# EAGLE board BCI_Module (EAGLE 6.4)
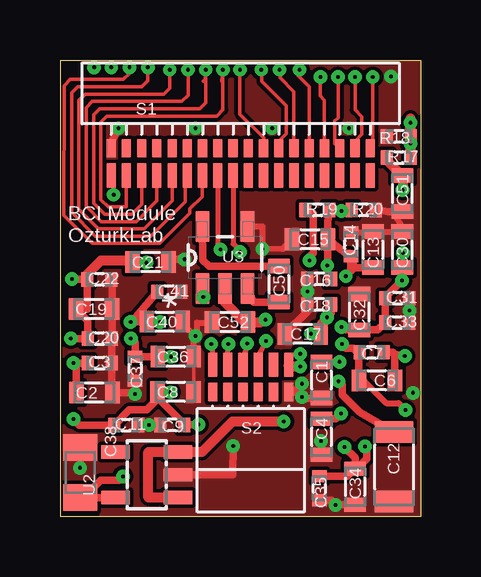
[diagram p0: board, top side]
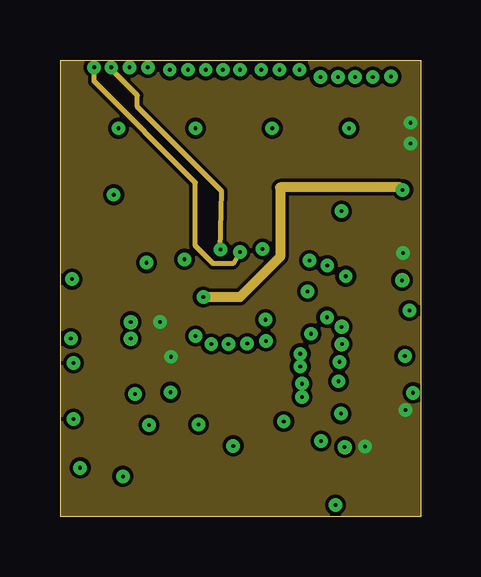
[diagram p1: board, inner layer Route2]
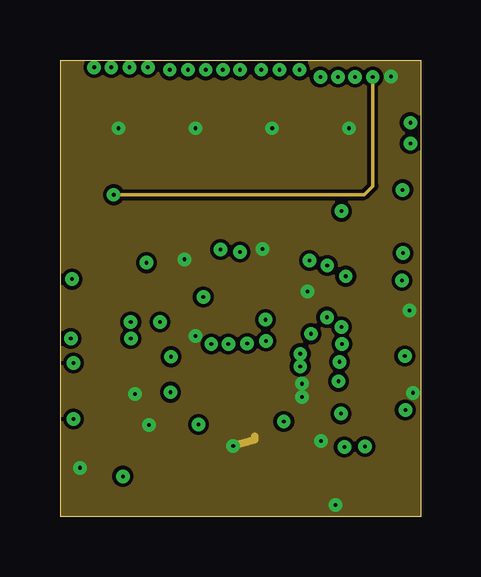
[diagram p2: board, inner layer Route3]
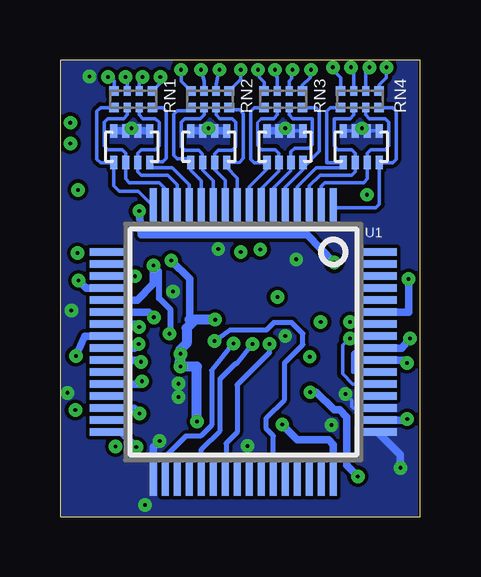
[diagram p3: board, bottom side, seen from below]

Size 15 x 19.02 mm. Coordinates in mm from the lower left corner, seen from the top.
Outline: 0,0 0,19.02 15,19.02 15,0 0,0
Copper layers (1*2*3*16): Top 0.035mm / dielectric 1.5mm / Route2 0.035mm / dielectric 0.15mm / Route3 0.035mm / dielectric 0.2mm / Bottom 0.035mm
Design rules "default *": minimum track width 5mil, minimum drill 5mil, track to track 6mil, track to pad 6mil, pad to pad 6mil, via to via 6mil, smd to smd 0mil, copper to edge 1mil, drill to drill 8mil, minimum pad ring 10mil, minimum via ring 8mil, stop-mask expansion 0mil, vias tented up to drill 7mil, thermal gap 10mil

## Footprints (pad centres in the part's own frame; a part is rotated, then mirrored left to right if it is on the bottom)
0603_R = smd 0.6 x 0.9: 1 -0.75,0; 2 0.75,0
0402_R = smd 0.5 x 0.6: 1 -0.5,0; 2 0.5,0
1206_R = smd 0.9 x 1.6: 1 -1.45,0; 2 1.45,0
R/2012-12R = smd 1.1 x 1.4: + 1.048,0; - -1.048,0
0402_R@1 = smd 0.5 x 0.6: 1 -0.5,0; 2 0.5,0
YC124 = smd 0.4 x 0.4: 1 -0.8,-0.35; 4 0.8,-0.35; 5 0.8,0.35; 8 -0.8,0.35 | smd 0.3 x 0.4: 2 -0.25,-0.35; 3 0.25,-0.35; 6 0.25,0.35; 7 -0.25,0.35
OMNETICS_A79025 = smd 0.381 x 0.762: B1 -5.397,-1.016; B2 -4.763,-1.016; B3 -4.128,-1.016; B4 -3.493,-1.016; B5 -2.857,-1.016; B6 -2.223,-1.016; B7 -1.587,-1.016; B8 -0.953,-1.016; B9 -0.318,-1.016; B10 0.318,-1.016; B11 0.953,-1.016; B12 1.587,-1.016; B13 2.223,-1.016; B14 2.857,-1.016; B15 3.493,-1.016; B16 4.128,-1.016; B17 4.763,-1.016; B18 5.397,-1.016 | smd 0.381 x 1.016: T1 -5.397,-2.159; T2 -4.763,-2.159; T3 -4.128,-2.159; T4 -3.493,-2.159; T5 -2.857,-2.159; T6 -2.223,-2.159; T7 -1.587,-2.159; T8 -0.953,-2.159; T9 -0.318,-2.159; T10 0.318,-2.159; T11 0.953,-2.159; T12 1.587,-2.159; T13 2.223,-2.159; T14 2.857,-2.159; T15 3.493,-2.159; T16 4.128,-2.159; T17 4.763,-2.159; T18 5.397,-2.159
OMNETICS_PZN-12-AA = smd 0.381 x 0.762: B1 1.587,-1.016; B2 0.953,-1.016; B3 0.318,-1.016; B4 -0.318,-1.016; B5 -0.953,-1.016; B6 -1.587,-1.016 | smd 0.381 x 1.016: T1 1.587,-2.159; T2 0.953,-2.159; T3 0.318,-2.159; T4 -0.318,-2.159; T5 -0.953,-2.159; T6 -1.587,-2.159
SQFP-S-10X10-64 = smd 0.3 x 1.6: 1 -3.75,-5.6; 2 -3.25,-5.6; 3 -2.75,-5.6; 4 -2.25,-5.6; 5 -1.75,-5.6; 6 -1.25,-5.6; 7 -0.75,-5.6; 8 -0.25,-5.6; 9 0.25,-5.6; 10 0.75,-5.6; 11 1.25,-5.6; 12 1.75,-5.6; 13 2.25,-5.6; 14 2.75,-5.6; 15 3.25,-5.6; 16 3.75,-5.6; 33 3.75,5.6; 34 3.25,5.6; 35 2.75,5.6; 36 2.25,5.6; 37 1.75,5.6; 38 1.25,5.6; 39 0.75,5.6; 40 0.25,5.6; 41 -0.25,5.6; 42 -0.75,5.6; 43 -1.25,5.6; 44 -1.75,5.6; 45 -2.25,5.6; 46 -2.75,5.6; 47 -3.25,5.6; 48 -3.75,5.6 | smd 1.6 x 0.3: 17 5.6,-3.75; 18 5.6,-3.25; 19 5.6,-2.75; 20 5.6,-2.25; 21 5.6,-1.75; 22 5.6,-1.25; 23 5.6,-0.75; 24 5.6,-0.25; 25 5.6,0.25; 26 5.6,0.75; 27 5.6,1.25; 28 5.6,1.75; 29 5.6,2.25; 30 5.6,2.75; 31 5.6,3.25; 32 5.6,3.75; 49 -5.6,3.75; 50 -5.6,3.25; 51 -5.6,2.75; 52 -5.6,2.25; 53 -5.6,1.75; 54 -5.6,1.25; 55 -5.6,0.75; 56 -5.6,0.25; 57 -5.6,-0.25; 58 -5.6,-0.75; 59 -5.6,-1.25; 60 -5.6,-1.75; 61 -5.6,-2.25; 62 -5.6,-2.75; 63 -5.6,-3.25; 64 -5.6,-3.75
SOT23-5$2 = smd 0.55 x 1.2: 1 -0.95,-1.3; 2 0,-1.3; 3 0.95,-1.3; 4 0.95,1.3; 5 -0.95,1.3
SOT95P280X145-5N = smd 1.27 x 0.559: 1 -1.295,0.94; 2 -1.295,0; 3 -1.295,-0.94; 4 1.295,-0.94; 5 1.295,0.94
CARR0508 = smd 0.3 x 0.56: P$1 -0.75,0.66; P$2 -0.75,-0.66; P$3 -0.25,0.66; P$4 -0.25,-0.66; P$5 0.25,0.66; P$6 0.25,-0.66; P$7 0.75,0.66; P$8 0.75,-0.66

## Placement (x,y rotation side)
C1  1uF  [0603_R]  10.87,5.69 270 top
C2  1uF  [0603_R]  1.41,5.17 0 top
C3  100nF  [0402_R]  1.63,6.4 0 top
C4  1uF  [0603_R]  10.87,3.33 270 top
C6  10uF  [0603_R]  13.17,5.68 180 top
C7  100nF  [0402_R]  12.96,6.85 180 top
C8  1uF  [0603_R]  4.79,5.2 0 top
C9  100nF  [0402_R]  4.64,3.82 180 top
C11  100nF  [0402_R]  2.73,3.81 0 top
C12  100uF  [1206_R]  13.89,2.07 270 top
C13  1uF  [0603_R]  13.01,11.12 90 top
C14  100nF  [0402_R]  12.09,11.34 90 top
C15  1uF  [0603_R]  10.39,11.55 180 top
C16  100nF  [0402_R]  10.78,9.9 180 top
C17  1uF  [0603_R]  10.09,7.61 180 top
C18  100nF  [0402_R]  10.78,8.84 180 top
C19  1uF  [0603_R]  1.39,8.65 0 top
C20  100nF  [0402_R]  1.62,7.42 0 top
C21  1uF  [0603_R]  3.75,10.61 0 top
C22  100nF  [0402_R]  1.61,9.89 0 top
C30  1uF  [0603_R]  14.23,11.12 90 top
C31  100nF  [0402_R]  14.03,9.1 0 top
C32  1uF  [0603_R]  12.44,8.53 90 top
C33  100nF  [0402_R]  14.02,8.09 0 top
C34  1uF  [0603_R]  12.27,1.24 270 top
C35  100nF  [0402_R]  10.78,1.17 270 top
C36  1uF  [0603_R]  4.8,6.66 0 top
C37  100nF  [0402_R]  3.1,6.17 270 top
C38  10uF  [R/2012-12R]  0.82,1.84 270 top
C40  1uF  [0603_R]  4.34,8.12 0 top
C41  100nF  [0402_R]  4.52,9.37 0 top
C50  1uF  [0603_R]  9.1,9.68 270 top
C51  1uF  [0603_R]  14.24,13.46 270 top
C52  1uF  [0603_R]  7.05,8.1 180 top
R17  4K99  [0402_R@1]  14.09,14.96 0 top
R18  4K99  [0402_R@1]  14.09,15.84 180 top
R19  4K99  [0402_R@1]  10.7,12.78 0 top
R20  4K99  [0402_R@1]  12.63,12.78 0 top
RN1  [YC124]  11.95,17.39 180 bottom
RN2  [YC124]  8.75,17.39 180 bottom
RN3  [YC124]  5.7,17.39 180 bottom
RN4  [YC124]  2.51,17.39 180 bottom
S1  OMNETICS_A79025  [OMNETICS_A79025]  7.5,16.37 0 top
S2  RHD2000-CABLE-AMP-SIDE  [OMNETICS_PZN-12-AA]  7.92,4.17 180 top
U1  ADS1299  [SQFP-S-10X10-64]  7.36,7.27 180 bottom
U2  FAN2500S33X  [SOT23-5$2]  3.59,1.74 90 top
U3  TPS60403DBVT  [SOT95P280X145-5N]  6.85,10.79 90 top
U$1  CARR0508  [CARR0508]  12.01,15.41 180 bottom
U$2  CARR0508  [CARR0508]  8.8,15.41 180 bottom
U$3  CARR0508  [CARR0508]  5.63,15.41 180 bottom
U$4  CARR0508  [CARR0508]  2.45,15.41 180 bottom

## Library data of the parts
C1-C4 C6-C9 C11-C22 C30-C37 C40 C41 C50-C52 R17-R20 U$1-U$4 = PBF
C38 = resistor
RN1-RN4 = resistor-dil; OC_FARNELL: unknown; OC_NEWARK: unknown
S1 S2 = RHD2000
U1 = yusuf
U2 = SparkFun
U3 = yusuf; MPN: TPS60403DBVT; OC_FARNELL: 8457786; OC_NEWARK: 77C0632; PACKAGE: SOT-23-5; SUPPLIER: Texas Instruments

## Nets
3V3: C8.1 C9.1 C11.1 C38.+ U1.48 U1.50 U2.5
+2.5V: C13.1 C14.1 C15.1 C16.1 C17.1 C18.1 C19.1 C20.1 C21.1 C22.1 R19.2 R20.1 U1.19 U1.21 U1.22 U1.54 U1.56 U1.59
+5V: C52.1 R19.1 S2.T6 U2.1 U2.3 U3.2
-2.5V: C6.2 C7.2 C30.1 C31.1 C32.1 C33.1 C34.1 C35.1 C36.1 C37.1 C40.1 C41.1 R17.2 R18.1 U1.20 U1.23 U1.25 U1.32 U1.53 U1.57 U1.58
-5V: C51.1 R17.1 U3.1
BIASREF: U1.60
CS1: S2.T1 U1.39
GND: C1.2 C2.2 C3.2 C4.2 C8.2 C9.2 C11.2 C12.2 C13.2 C14.2 C15.2 C16.2 C17.2 C18.2 C19.2 C20.2 C21.2 C22.2 C30.2 C31.2 C32.2 C33.2 C34.2 C35.2 C36.2 C37.2 C38.- C40.2 C41.2 C51.2 C52.2 R18.2 R20.2 S1.B1 S2.B6 U1.33 U1.49 U1.51 U2.2 U3.4 U$1.P$2 U$1.P$4 U$1.P$6 U$1.P$8 U$2.P$2 U$2.P$4 U$2.P$6 U$2.P$8 U$3.P$2 U$3.P$4 U$3.P$6 U$3.P$8 U$4.P$2 U$4.P$4 U$4.P$6 U$4.P$8
GPIO2: U1.44
MISO1: S2.T4 U1.43
MOSI1: S2.T3 U1.34
N$1: C1.1 U1.26
N$2: C2.1 C3.1 U1.55
N$4: C4.1 U1.30
N$6: C6.1 C7.1 U1.24
N$8: RN1.5 U1.16 U$1.P$7
N$9: C12.1 U1.28
N$10: RN1.1 S1.B15
N$11: RN1.2 S1.B16
N$12: RN1.3 S1.B17
N$13: RN1.4 S1.B18 S1.T1
N$14: RN2.8 U1.9 U$2.P$1
N$15: RN2.7 U1.10 U$2.P$3
N$16: RN2.6 U1.11 U$2.P$5
N$17: RN2.5 U1.12 U$2.P$7
N$18: RN2.1 S1.B11
N$19: RN2.2 S1.B12
N$20: RN2.3 S1.B13
N$21: RN2.4 S1.B14
N$22: RN3.8 U1.5 U$3.P$1
N$23: RN3.7 U1.6 U$3.P$3
N$24: RN3.6 U1.7 U$3.P$5
N$25: RN3.5 U1.8 U$3.P$7
N$26: C50.1 U3.5
N$27: C50.2 U3.3
N$28: RN3.4 S1.T2
N$29: RN3.3 S1.T3
N$30: RN3.2 S1.T4
N$31: RN3.1 S1.T5
N$32: RN4.8 U1.1 U$4.P$1
N$33: RN4.7 U1.2 U$4.P$3
N$34: RN4.6 U1.3 U$4.P$5
N$35: RN4.5 U1.4 U$4.P$7
N$36: RN4.4 S1.T6
N$37: RN4.3 S1.T7
N$38: RN4.2 S1.T8
N$39: RN4.1 S1.T9
N$44: RN1.7 U1.14 U$1.P$3
N$45: RN1.8 U1.13 U$1.P$1
N$48: RN1.6 U1.15 U$1.P$5
SCK1: S2.T2 U1.37

## Tracks (layer width: path | path; a pad name or v marks a point on that pad's centre or on a via)
3V3  (via drill 0.15)
  Top 0.305: v0.53,4.06 0.79,3.81 C11.1 2.86,4.45 3.58,4.45 4.04,4.91 C8.1 | v5.74,3.83 5.16,3.83 C9.1 5.03,3.93 5.03,3.96 4.1,4.89 C8.1 | v2.59,1.68 2.44,1.52 1.68,1.52 0.94,0.79 C38.+ U2.5 | v4.57,5.18 4.56,5.2 C8.1
  Bottom 0.305: v0.53,4.06 0.57,4.02 U1.50 | v5.74,3.83 5.11,3.2 3.81,3.2 3.61,3 U1.48 | v2.59,1.68 3.05,2.13 3.05,4.14 3.35,4.45 3.58,4.45 4.32,5.18 v4.57,5.18
+2.5V  (via drill 0.15, 0.15 pad 0.46)
  Top 0.254: v3.57,10.58 3.54,10.61 C21.1 | C17.1 v10.43,7.61 v10.43,7.62
  Top 0.305: C13.1 12.23,10.37 v11.88,10.02 | C14.1 12.09,10.23 v11.88,10.02 | C15.1 11.14,10.49 v11.11,10.46 11.11,10.07 C16.1 | C17.1 10.84,8.05 v11.09,8.3 11.28,8.49 C18.1 | v0.42,7.42 0.53,7.42 C20.1 1.12,8.17 C19.1 1.11,8.65 C22.1 v0.47,9.89 | C15.1 11.14,12.26 R19.2 12.12,12.78 R20.1 12.12,12.73 v11.7,12.72 | v11.88,10.02 11.88,10.05 12.19,10.36 12.19,10.82 12.04,10.97 11.87,10.97 C15.1
  Top 0.406: C21.1 2.94,10.67 1.68,10.67 1.11,10.11 C22.1
  Bottom 0.152: U1.54 2.79,6.02 2.79,6.81 2.58,7.02 U1.56
  Bottom 0.254: v10.43,7.62 10.39,7.66 10.39,8.61 10.87,9.09 10.87,10.23 v11.11,10.46
  Bottom 0.305: U1.19 v11.89,10.02 v11.88,10.02 | U1.21 11.78,9.02 11.11,9.7 v11.11,10.46 | U1.22 11.31,8.52 v11.09,8.3 | U1.56 0.77,7.02 v0.42,7.42 | U1.59 0.47,8.52 v0.47,9.89 | v3.57,10.58 4.7,11.73 11.61,11.73 v11.7,12.72
+5V  (via drill 0.15)
  Top 0.305: R19.1 10.52,12.64 10.52,10.97 10.36,10.82 v10.36,10.67
  Top 0.406: U2.1 3.66,0.79 3.66,2.69 U2.3 5.89,2.69 7.16,3.96 v9.3,3.96 9.3,3.91 | v9.98,6.25 9.51,6.25 S2.T6 | v8.53,8.2 8.36,8.11 C52.1 7.67,8.11 6.85,8.93 U3.2
  Bottom 0.305: v10.36,10.67 9.6,9.91 9.6,8.2
  Bottom 0.406: v9.3,3.96 9.3,6.25 v9.98,6.25 | v9.98,6.25 10.01,6.25 v9.98,6.78 | v8.53,8.2 9.38,8.2 | 9.6,8.2 9.38,8.2 | 9.38,8.2 9.73,7.85 9.73,7.21 9.98,6.96 v9.98,6.25
-2.5V  (via drill 0.15 pad 0.46)
  Top 0.254: v14.27,10.97 14.23,10.94 C30.1 | 12.61,5.68 13.56,4.72 14.08,4.72 v14.36,4.44
  Top 0.305: v11.7,7.9 11.83,7.78 C32.1 13.21,7.78 C33.1 13.53,8.1 C31.1 13.53,9.15 v14.23,9.84 v14.23,9.85 C30.1 | v11.72,7.19 11.88,7.02 12.19,7.02 12.37,6.85 C7.2 12.42,6.81 C6.2 12.61,5.68 | C35.1 11.95,1.67 C34.1 | C34.1 12.27,2.45 v11.82,2.9 | v2.92,7.42 3.1,7.25 C37.1 C36.1 v4.59,6.66 | C41.1 3.1,8.29 v2.92,8.11 2.93,8.12 C40.1 3.59,8.11 v4.14,8.11 | v12.69,2.92 12.75,2.98 12.75,2.41 12.33,1.99 C34.1
  Top 0.406: R17.2 14.57,16.35 | R18.1 14.57,16.58 v14.57,16.41 14.57,16.35 | 14.57,16.35 v14.57,15.55
  Bottom 0.152: U1.53 2.81,5.52 3.23,5.95 3.23,7.13 3.05,7.32 v2.92,7.42
  Bottom 0.305: U1.23 11.82,8.02 v11.7,7.9 | U1.25 11.88,7.02 v11.72,7.19 | U1.32 12.45,3.52 v11.82,2.9 | U1.20 13.91,9.52 v14.23,9.84 | U1.57 2.83,7.52 v2.92,7.42 | U1.58 2.83,8.02 v2.92,8.11
  pour Route2 (no thermals): 0,-0.15 15.09,-0.15 15.09,19.66 0,19.66
-5V  (via drill 0.15)
  Top 0.406: R17.1 13.59,14.86 C51.1 14.25,14.04 v14.25,13.61 | v5.94,9.14 5.91,9.18 U3.1
  Route2 0.406: v14.25,13.61 14.15,13.72 9.14,13.72 9.14,10.82 7.47,9.14 v5.94,9.14
CS1  (via drill 0.15)
  Top 0.203: S2.T1 6.33,7.03 v6.27,7.19
  Bottom 0.203: v6.27,7.19 6.27,6.83 7.62,5.49 7.62,3.5 8.08,3.05 8.08,1.71 U1.39
GND  (via drill 0.15)
  Top 0.152: 12.98,11.84 C13.2 | C30.2 14.3,11.94 | C40.2 5.09,8.04 | 5.69,7.52 v5.61,7.52 5.55,7.45 | 6.17,8.08 C52.2 | 12.26,9.37 C32.2 | C8.2 C36.2
  Top 0.254: C14.2 12.98,11.84 | C13.2 C30.2 | 13.84,12.7 14.3,11.94 | U3.4 8.41,12.09 v8.41,11.15 9.24,11.15 C15.2 | 5.09,8.04 v5.61,7.52 | 5.69,7.52 5.69,8.08 6.17,8.08 | C36.2 5.55,7.45
  Top 0.305: C1.2 10.1,4.94 v10.06,4.98 | C4.2 10.87,3.12 v10.85,3.15 | C35.2 11.27,0.67 v11.46,0.48 11.46,0.49 C34.2 | S2.B6 9.71,5.18 v10.06,5.54 | C31.2 v14.53,8.59 14.52,8.57 C33.2 | C37.2 v3.1,5.11 3.04,5.17 C2.2 2.13,5.19 C3.2 2.13,7.41 C20.2 2.14,7.44 C19.2 2.14,9.89 C22.2 | C11.2 v3.68,3.81 v3.68,3.82 C9.2 | U2.2 7.16,1.74 v7.19,2.95 | C17.2 10.29,8.56 | 10.29,8.56 v10.29,9.37 C16.2 | C38.- v0.81,2.03 | 10.29,8.56 10.28,8.57 C18.2 | R20.2 13.66,12.7 13.84,12.7 | S1.B1 2.1,15.59 v2.41,16.18 | 4.36,10.72 v5.16,10.72
  Route3 0.305: v7.19,2.95 8.08,3.2 8.08,3.35
  Bottom 0.152: U$4.P$2 U$4.P$4 2.22,16.07 v2.41,16.18 2.65,16.07 U$4.P$6 U$4.P$8 | U$3.P$2 U$3.P$4 5.42,16.07 v5.61,16.18 | U1.51 2.77,4.52 2.85,4.6 2.85,4.85 v3.1,5.11
  Bottom 0.305: U1.33 11.11,2.88 v10.85,3.15 | U1.49 0.81,2.58 v0.81,2.03 | v5.61,16.18 5.81,16.13 U$3.P$6 U$3.P$8 | U$2.P$2 U$2.P$4 8.67,16.18 v8.81,16.18 8.94,16.18 U$2.P$6 U$2.P$8 | U$1.P$2 U$1.P$4 11.88,16.18 v12.01,16.18 12.15,16.18 U$1.P$6 U$1.P$8
  other vias: 14.68,5.16 13.77,18.34
  pour Route3: 0,0 15.09,0 15.09,19.66 0,19.66
  pour Top (no thermals): 0.15,0 15.24,0 15.24,19.66 0.15,19.66
  pour Bottom (no thermals): 0.15,0 15.24,0 15.24,19.66 0.15,19.66
MISO1  (via drill 0.15)
  Top 0.203: v8.56,7.32 8.23,6.7 S2.T4
  Bottom 0.203: U1.43 6.11,3.37 6.4,3.66 6.4,4.12 5.64,4.88 5.64,6.4 4.88,7.16 4.88,7.62 5.33,8.08 6.1,8.08 6.4,7.77 7.92,7.77 v8.56,7.32
MOSI1  (via drill 0.15)
  Top 0.203: S2.T3 v7.77,7.21
  Bottom 0.203: v7.77,7.21 8.69,6.1 8.69,3.81 9.14,3.35 9.75,3.35 10.61,2.5 U1.34
N$1  (via drill 0.15 pad 0.46)
  Top 0.305: C1.1 11.61,6.44 v11.62,6.45
  Bottom 0.305: U1.26 11.7,6.52 v11.62,6.45
N$2  (via drill 0.15 pad 0.46)
  Top 0.305: C3.1 v0.54,6.4 0.66,6.28 C2.1
  Bottom 0.305: U1.55 0.67,6.52 v0.54,6.4
N$4  (via drill 0.15 pad 0.46)
  Top 0.305: C4.1 11.47,4.08 v11.68,4.29
  Bottom 0.305: U1.30 11.91,4.52 v11.68,4.29
N$6  (via drill 0.15 pad 0.46)
  Top 0.305: C6.1 13.92,6.75 | 13.92,6.75 v14.34,6.69 | C7.1 13.83,6.85 13.92,6.75
  Bottom 0.305: U1.24 13.96,7.52 v14.34,6.69
N$8
  Bottom 0.152: RN1.5 13.31,17.04 13.46,16.89 13.46,14.9 13.31,14.75 U$1.P$7 12.76,13.79 12.54,13.56 11.73,13.56 11.11,12.94 U1.16
N$9  (via drill 0.15)
  Top 0.305: C12.1 12.47,4.34 11.73,5.08 11.73,5.49 v11.58,5.64
  Bottom 0.305: v11.58,5.64 11.7,5.52 U1.28
N$10  (via drill 0.15)
  Top 0.152: v10.82,18.31 10.82,17.53 10.99,17.35 S1.B15
  Bottom 0.152: RN1.1 10.82,18.06 v10.82,18.31
N$11  (via drill 0.15)
  Top 0.152: v11.56,18.31 11.56,16.61 11.43,16.48 11.43,15.54 11.56,15.42 11.56,15.12 S1.B16
  Bottom 0.152: RN1.2 11.7,18.17 v11.56,18.31
N$12  (via drill 0.15)
  Top 0.152: v12.27,18.31 12.27,16.94 12.55,16.66 12.55,15.93 12.27,15.65 12.27,15.05 S1.B17
  Bottom 0.152: RN1.3 12.2,18.24 v12.27,18.31
N$13  (via drill 0.15)
  Top 0.152: v13.01,18.31 13.01,15.05 S1.B18 | S1.T1 2.21,14.1 v2.21,13.41
  Route3 0.152: v2.21,13.41 12.65,13.41 13.01,13.77 v13.01,18.31
  Bottom 0.152: RN1.4 12.75,18.13 v13.01,18.31
N$14
  Bottom 0.152: U1.9 7.61,14.1 8.05,14.55 U$2.P$1 7.51,14.77 7.37,14.92 7.37,16.79 7.52,16.94 7.95,16.94 RN2.8
N$15
  Bottom 0.152: U1.10 8.11,14 8.55,14.45 U$2.P$3 8.55,15.12 8.4,15.27 7.82,15.27 7.67,15.41 7.67,16.44 7.82,16.59 8.35,16.59 8.5,16.74 RN2.7
N$16
  Bottom 0.152: U1.11 8.61,13.99 9.05,14.44 U$2.P$5 9.07,14.56 9.07,15.12 9.22,15.27 9.81,15.27 9.96,15.41 9.96,16.44 9.81,16.59 9.15,16.59 9,16.74 RN2.6
N$17
  Bottom 0.152: U1.12 9.11,13.99 9.55,14.43 U$2.P$7 9.55,14.91 10.11,14.91 10.26,15.06 10.26,16.77 10.11,16.92 9.55,16.92 RN2.5
N$18  (via drill 0.15)
  Top 0.152: S1.B11 8.45,15.78 7.47,16.76 v7.47,18.62
  Bottom 0.152: v7.47,18.62 7.47,18.21 RN2.1
N$19  (via drill 0.15)
  Top 0.152: v8.36,18.62 8.38,18.59 8.38,18.14 9.09,17.43 9.4,17.12 9.4,15.95 9.09,15.64 S1.B12
  Bottom 0.152: RN2.2 8.5,18.02 v8.36,18.62
N$20  (via drill 0.15)
  Top 0.152: v9.12,18.62 9.14,18.44 9.14,18.29 9.72,17.71 S1.B13
  Bottom 0.152: RN2.3 9,18.14 v9.12,18.62
N$21  (via drill 0.15)
  Top 0.152: v9.96,18.62 9.91,18.59 9.91,18.36 10.36,17.91 S1.B14
  Bottom 0.152: RN2.4 9.96,18.15 v9.96,18.62
N$22
  Bottom 0.152: RN3.8 4.34,17.04 4.19,16.89 4.19,15.21 4.85,14.55 U$3.P$1 4.88,14.45 5.61,13.72 U1.5
N$23
  Bottom 0.152: RN3.7 5.45,16.74 5.3,16.59 4.5,16.59 4.5,15.49 4.65,15.34 5.23,15.34 5.38,15.19 U$3.P$3 5.38,14.41 6.11,13.68 U1.6
N$24
  Bottom 0.127: 6.61,15.29 6.76,15.44 6.76,16.44 6.61,16.59
  Bottom 0.152: 6.61,15.29 6.03,15.29 5.88,15.14 U$3.P$5 5.88,14.39 6.61,13.66 U1.7 | 6.61,16.59 6.1,16.59 5.95,16.74 RN3.6
N$25
  Bottom 0.152: RN3.5 6.91,17.04 7.06,16.89 7.06,14.9 6.91,14.75 U$3.P$7 6.38,14.48 7.11,13.74 U1.8
N$26
  Top 0.305: U3.5 5.93,10.69 6.18,10.44 9.12,10.44 C50.1
N$27
  Top 0.305: U3.3 8.04,8.93 C50.2
N$28  (via drill 0.15)
  Top 0.152: 6.71,18.14 v6.76,18.62 6.76,16.94 6.5,16.69 1.93,16.69 1.68,16.43 1.68,13.21 1.98,12.9 2.74,12.9 S1.T2
  Bottom 0.152: RN3.4 6.5,18.11 6.71,18.31 6.71,18.59 v6.76,18.62
N$29  (via drill 0.15)
  Top 0.152: 5.94,18.14 6.02,18.21 v6.04,18.62 6.04,17.25 5.79,16.99 1.63,16.99 1.37,16.74 1.37,13.06 1.83,12.6 2.97,12.6 3.37,13.01 S1.T3
  Bottom 0.152: RN3.3 5.95,18.29 v6.04,18.62
N$30  (via drill 0.15)
  Top 0.152: S1.T4 4.01,13.16 3.14,12.29 1.7,12.29 1.07,12.93 1.07,17.04 1.32,17.3 5.05,17.3 5.31,17.55 v5.31,18.62
  Bottom 0.152: RN3.2 5.45,18.15 5.33,18.26 5.33,18.59 v5.31,18.62
N$31  (via drill 0.15)
  Top 0.152: v4.55,18.62 4.55,17.86 4.29,17.6 1.02,17.6 0.76,17.35 0.76,12.8 1.57,11.99 1.6,11.99 3.46,11.99 3.47,11.99 4.64,13.16 S1.T5
  Bottom 0.152: RN3.1 4.9,17.96 4.57,18.29 4.57,18.59 v4.55,18.62
N$32
  Bottom 0.152: U1.1 1.84,12.87 1.7,13.02 U$4.P$1 1.14,14.75 0.99,14.9 0.99,16.89 1.14,17.04 RN4.8
N$33
  Bottom 0.152: U1.2 4.11,13.77 3.96,13.92 2.35,13.92 2.19,14.07 U$4.P$3 2.19,15.14 2.04,15.29 1.45,15.29 1.29,15.44 1.29,16.44 1.45,16.59 2.11,16.59 2.26,16.74 RN4.7
N$34
  Bottom 0.152: U1.3 4.61,13.78 4.17,14.22 2.85,14.22 2.69,14.37 U$4.P$5 2.69,15.14 2.85,15.29 3.43,15.29 3.58,15.44 3.58,16.59 2.91,16.59 2.76,16.74 RN4.6
N$35
  Bottom 0.152: U1.4 5.11,13.74 4.32,14.53 3.19,14.53 U$4.P$7 3.89,14.75 3.89,16.89 3.74,17.04 RN4.5
N$36  (via drill 0.15)
  Top 0.15: 3.75,11.68 1.45,11.68
  Top 0.152: 3.63,18.26 v3.63,18.72 3.63,18.16 3.38,17.91 0.71,17.91 0.46,17.65 0.46,12.68 1.45,11.68 | S1.T6 5.18,14.02 5.18,13.11 3.75,11.68
  Bottom 0.152: RN4.4 3.31,18.29 3.61,18.59 3.66,18.59 v3.63,18.72
N$37  (via drill 0.15)
  Top 0.152: S1.T7 5.89,13.84 5.89,13.34 5.38,12.83 5.38,12.63 4.13,11.38 1.32,11.38 0.12,12.55 0.15,17.96 0.41,18.21 2.62,18.21 2.87,18.47 v2.87,18.72
  Bottom 0.152: RN4.3 2.76,18.61 v2.87,18.72
N$38  (via drill 0.15)
  Top 0.203: S1.T8 6.55,11.28 v6.66,11.12
  Route2 0.203: v6.66,11.12 6.71,13.56 3.2,17.07 3.2,17.55 2.13,18.62 2.13,18.75 v2.11,18.72
  Bottom 0.152: RN4.2 2.26,18.77 v2.11,18.72
N$39  (via drill 0.15)
  Top 0.203: S1.T9 7.18,11.36 7.52,11.02 v7.47,11.02
  Route2 0.203: v7.47,11.02 7.19,10.54 6.35,10.54 5.61,11.28 5.61,13.92 1.4,18.14 v1.4,18.72
  Bottom 0.152: RN4.1 1.71,17.99 1.41,18.29 v1.4,18.72
N$44
  Bottom 0.152: U1.14 10.11,13.82 10.52,14.22 11.61,14.22 11.76,14.37 U$1.P$3 11.76,15.14 11.61,15.29 11.02,15.29 10.87,15.44 10.87,16.44 11.02,16.59 11.55,16.59 11.7,16.74 RN1.7
N$45
  Bottom 0.152: RN1.8 10.72,17.04 10.57,16.89 10.57,14.93 10.72,14.78 11.12,14.78 U$1.P$1 11.26,14.53 10.32,14.53 9.61,13.82 U1.13
N$48
  Bottom 0.152: U1.15 10.61,13.66 10.86,13.92 12.11,13.92 12.26,14.07 U$1.P$5 12.26,15.14 12.41,15.29 13.01,15.29 13.16,15.44 13.16,16.44 13.01,16.59 12.35,16.59 12.2,16.74 RN1.6
SCK1  (via drill 0.15)
  Top 0.203: v6.99,7.19 6.91,6.38 S2.T2
  Bottom 0.203: U1.37 9.11,2.8 8.33,3.58 8.33,5.74 7.7,6.38 7.64,6.38 v6.99,7.19
(copper drawn outside any net)
  shapes: Route2 circle x6

## Text on the board
tPlace: BCI Module | OzturkLab